# EAGLE board Video 1 (EAGLE 9.6.2)
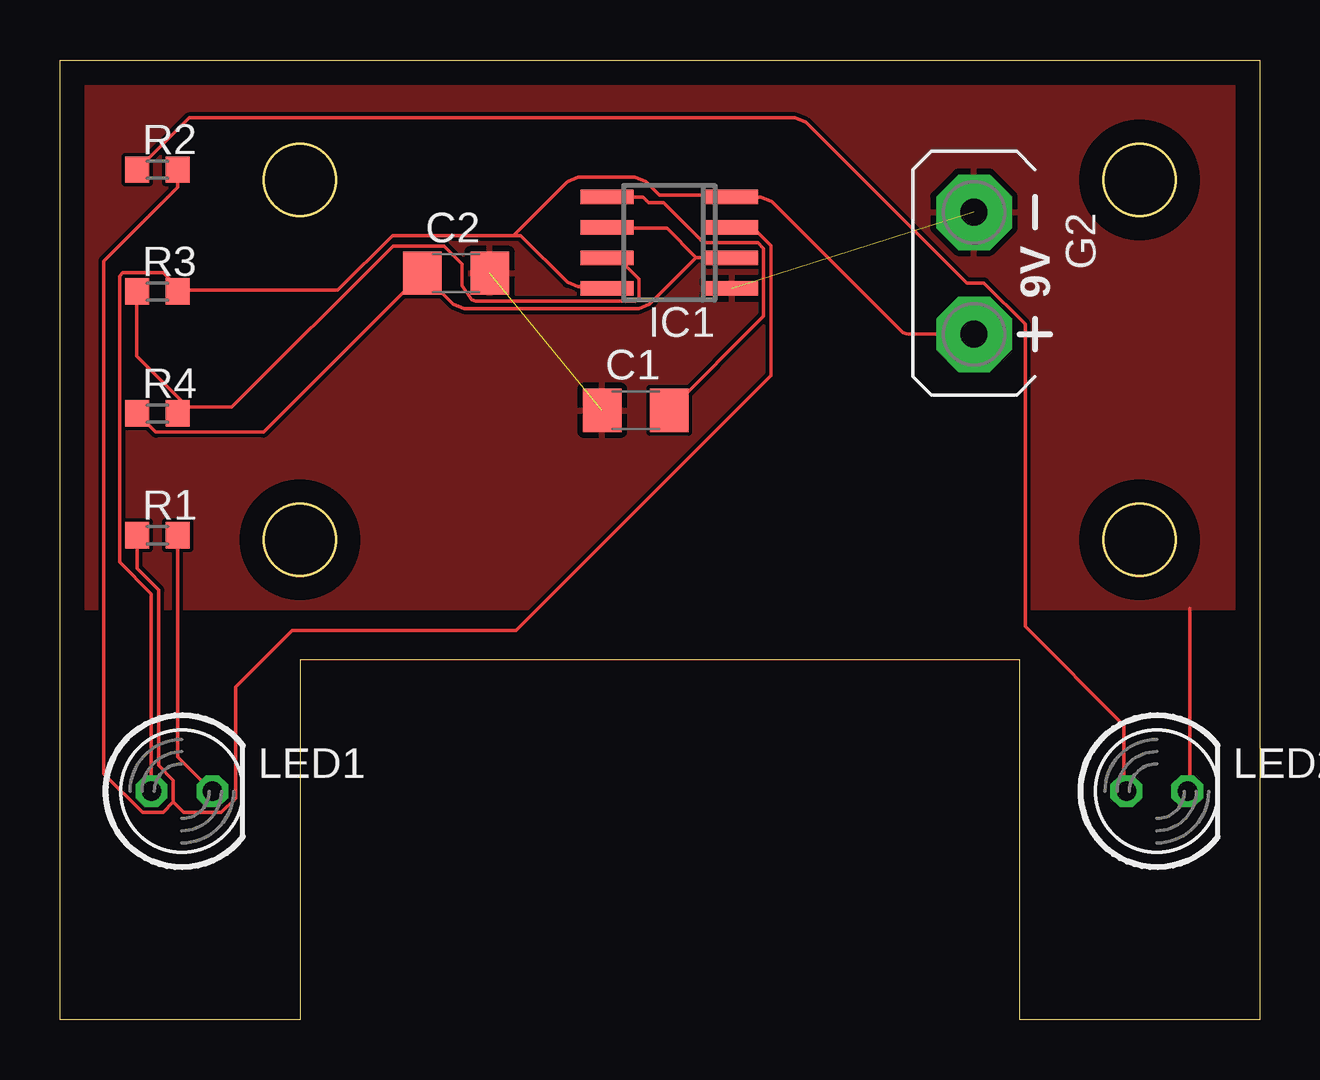
[diagram p0: board, top side]
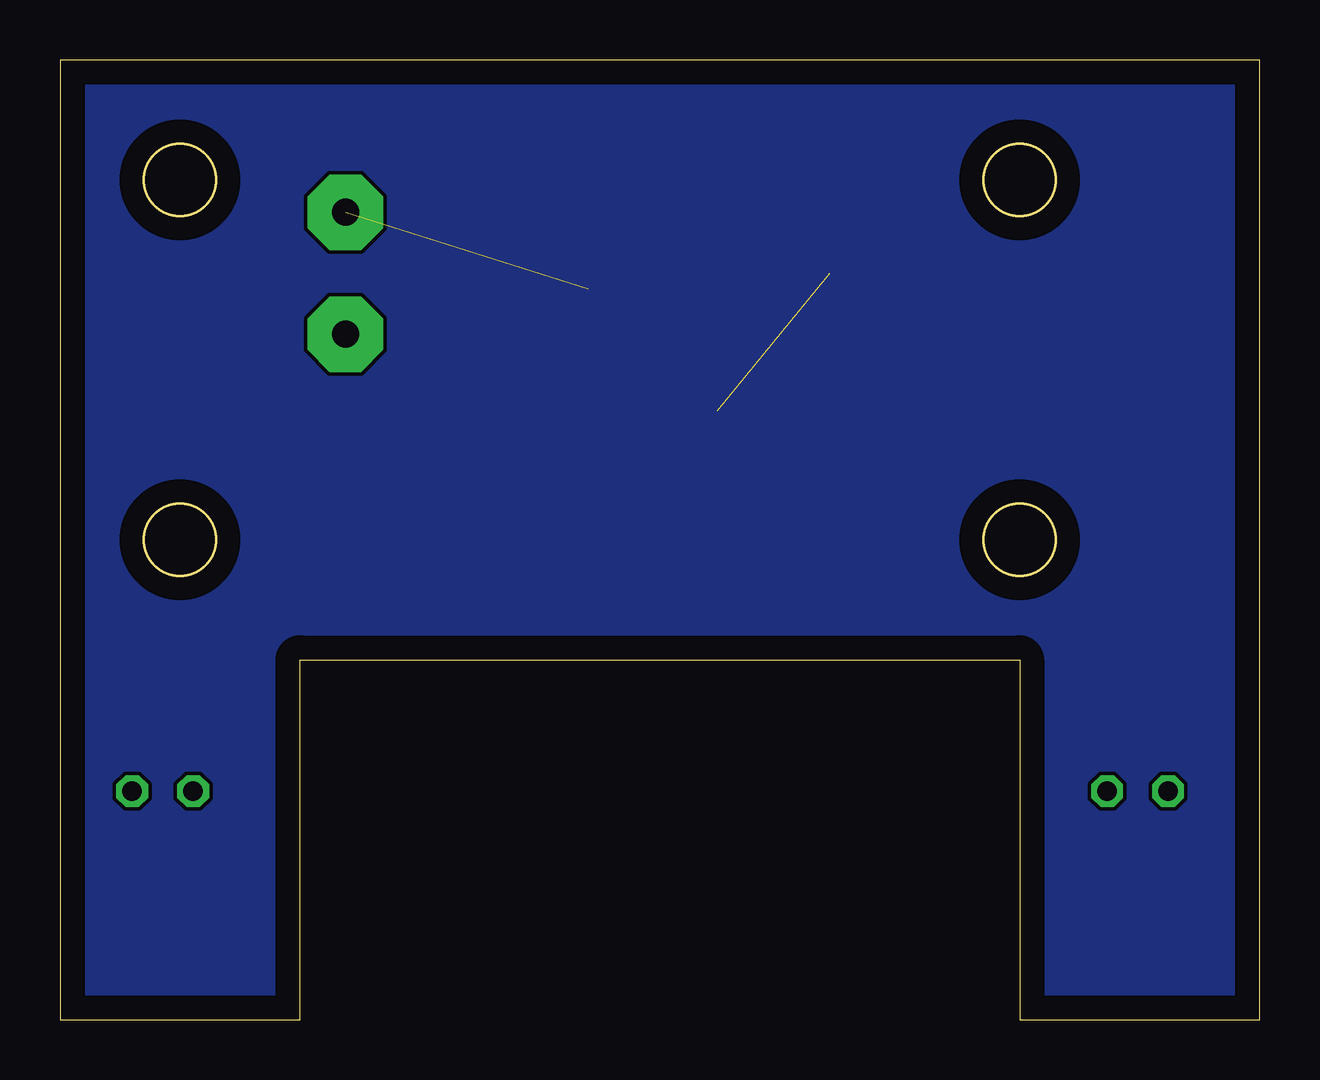
[diagram p1: board, bottom side, seen from below]

Size 50 x 40 mm. Coordinates in mm from the lower left corner, seen from the top.
Outline: 0,0 0,40 50,40 50,0 40,0 40,15 10,15 10,0 0,0
Outline: circle at 45,20 radius 1.5
Outline: circle at 45,35 radius 1.5
Outline: circle at 10,20 radius 1.5
Outline: circle at 10,35 radius 1.5
Copper layers (1*16): Top 0.035mm / dielectric 1.5mm / Bottom 0.035mm
Design rules "default": minimum track width 6mil, minimum drill 0.35mm, track to track 6mil, track to pad 6mil, pad to pad 6mil, via to via 6mil, smd to smd 6mil, copper to edge 40mil, drill to drill 6mil, minimum pad ring 10mil, minimum via ring 8mil, stop-mask expansion 4mil, vias tented up to drill 0mil, thermal gap 10mil

## Footprints (pad centres in the part's own frame; a part is rotated, then mirrored left to right if it is on the bottom)
C1206 = smd 1.6 x 1.8: 1 -1.4,0; 2 1.4,0
AB9V = drill 1.118 pad 3.15 octagon: + 0,2.54; - 0,-2.54
SO08 = smd 0.6 x 2.2: 1 -1.905,-2.6; 2 -0.635,-2.6; 3 0.635,-2.6; 4 1.905,-2.6; 5 1.905,2.6; 6 0.635,2.6; 7 -0.635,2.6; 8 -1.905,2.6
LED5MM = drill 0.813 octagon: A -1.27,0; K 1.27,0
R0603 = smd 1 x 1.1: 1 -0.85,0; 2 0.85,0

## Placement (x,y rotation side)
C1  10nF  [C1206]  24,25.39 0 top
C2  1nF  [C1206]  16.51,31.11 0 top
G2  AB9V  [AB9V]  38.1,31.11 180 top
IC1  NE555D  [SO08]  25.4,32.38 90 top
LED1  [LED5MM]  5.08,9.52 0 top
LED2  [LED5MM]  45.72,9.52 0 top
R1  330E  [R0603]  4.06,20.19 0 top
R2  300E  [R0603]  4.06,35.43 0 top
R3  1k  [R0603]  4.06,30.35 0 top
R4  100k  [R0603]  4.06,25.27 0 top

## Library data of the parts
C1 = rcl; SPICEPREFIX: C
C2 = rcl; SPICEPREFIX: C; VC: 24v
G2 = battery
IC1 = linear
LED1 LED2 = led
R1-R4 = rcl; SPICEPREFIX: R

## Nets
+9V: G2.+ IC1.4 IC1.8 LED1.A R3.2
GND: C1.1 C2.2 G2.- IC1.1 LED2.K
N$1: C2.1 IC1.2 IC1.6 R4.1
N$3: LED1.K R1.2
N$4: IC1.3 R1.1 R2.2
N$5: LED2.A R2.1
N$6: IC1.7 R3.1 R4.2
N$7: C1.2 IC1.5

## Tracks (layer width: path | path; a pad name or v marks a point on that pad's centre or on a via)
+9V
  Top 0.152: 5.03,30.4 11.58,30.4 13.87,32.69 18.9,32.69 | 18.9,32.69 19.2,32.69 21.15,30.74 21.6,30.55 22.71,30.55 IC1.8 | 18.9,32.69 21.15,34.94 21.6,35.12 23.97,35.12 24.42,34.94 24.99,34.36 27.89,34.36 IC1.4 29.23,34.28 29.68,34.1 35.13,28.64 35.26,28.59 35.36,28.57 G2.+ | LED1.A 3.81,17.75 2.48,19.07 2.48,30.99 2.62,31.13 4.3,31.13 5.03,30.4 | 5.03,30.4 R3.2
GND  (2 unrouted)
  Top 0.152: 47.09,17.14 47.09,9.52 LED2.K
  pour Top: 0,40 0,17.14 49.53,17.14 49.53,40
N$1
  Top 0.152: 26.52,31.77 25.3,32.99 22.82,32.99 IC1.6 | 26.52,31.77 27.89,31.77 IC1.2 | 26.52,31.77 24.57,29.83 24.13,29.64 16.84,29.64 16.39,29.83 C2.1 8.49,24.49 3.99,24.49 R4.1
N$2
  pour Bottom: 10,0 0,0 0,40 50,40 50,0 40,0 40,15 10,15
N$3
  Top 0.152: LED1.K 4.91,10.96 R1.2
N$4
  Top 0.152: 4.72,9.06 4.72,9.98 4.12,10.59 4.12,17.9 3.21,18.8 R1.1 | IC1.3 28.02,32.99 28.91,32.99 29.63,32.27 29.63,26.84 19.02,16.23 9.68,16.23 7.32,13.86 7.32,9.23 6.72,8.63 5.16,8.63 4.72,9.06 | R2.2 4.91,34.7 1.83,31.62 1.83,10.24 3.44,8.63 4.29,8.63 4.72,9.06
N$5
  Top 0.152: LED2.A 44.35,9.62 44.35,12.26 40.23,16.38 40.23,28.99 38.52,30.7 37.8,30.7 31.09,37.41 30.64,37.59 5.38,37.59 R2.1
N$6
  Top 0.152: 5.03,25.52 5.03,25.37 R4.2 5.03,25.52 | 5.03,25.52 5.03,25.83 3.2,27.66 3.2,30.25 R3.1 | 5.03,25.52 7.16,25.52 13.88,32.24 16,32.24 16.76,31.48 16.76,30.6 17.16,30.01 17.31,29.95 24,29.95 24.13,30.08 24.13,30.87 23.25,31.74 IC1.7
N$7
  Top 0.152: IC1.5 24.31,34.28 24.54,34.06 25.15,34.06 26.82,32.38 29.09,32.38 29.33,32.14 29.33,29.32 C1.2